# EAGLE board Carloop-v3.0 (EAGLE 7.5.0)
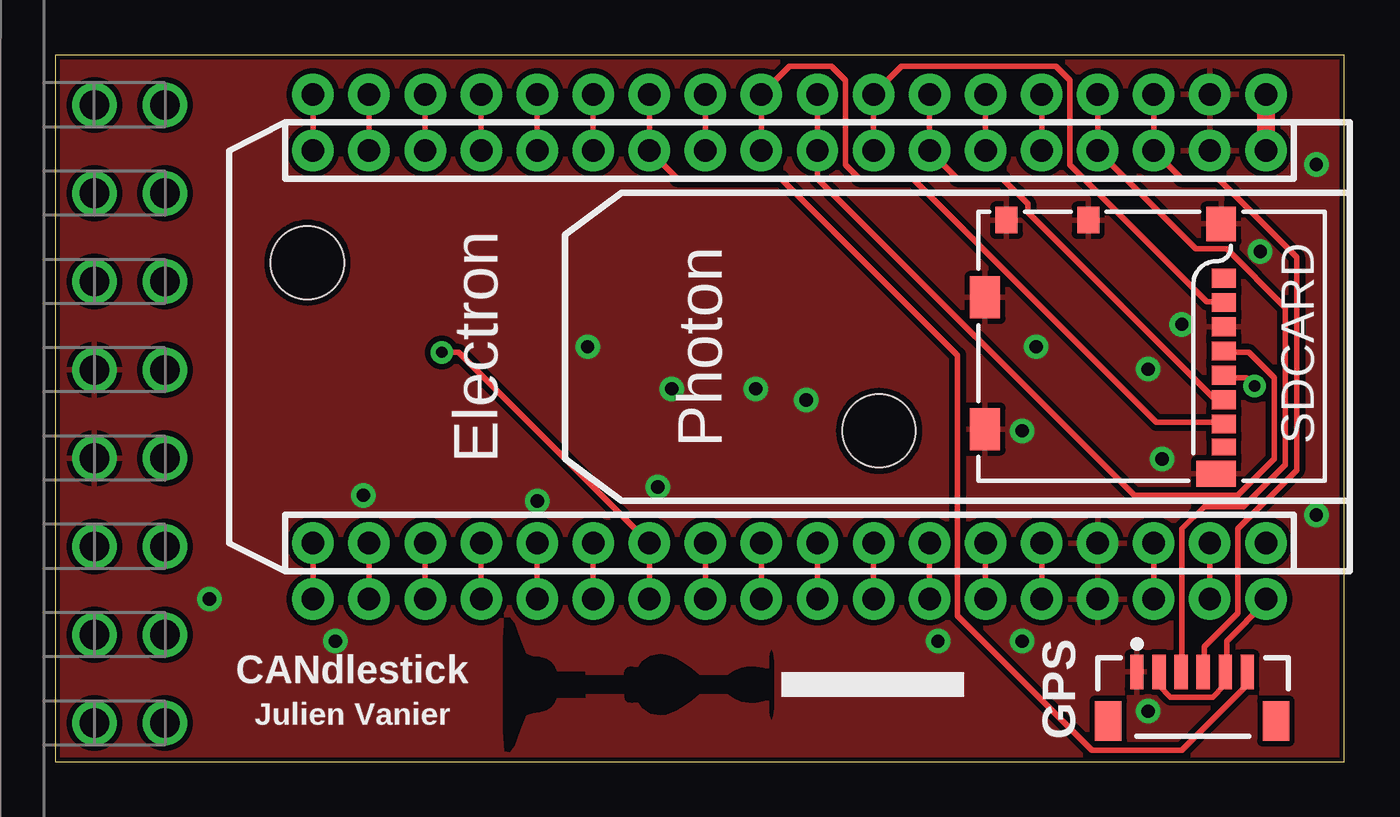
[diagram p0: board, top side]
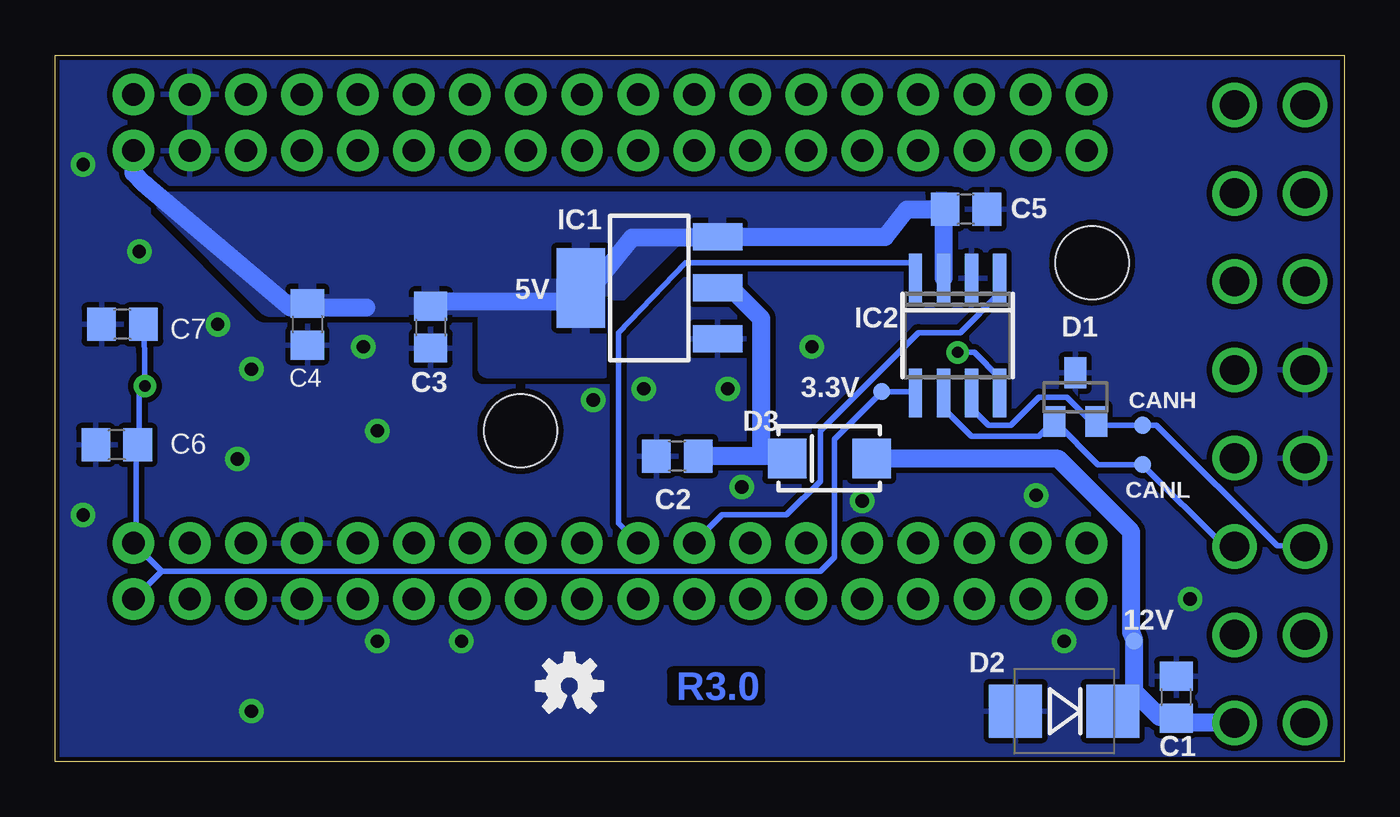
[diagram p1: board, bottom side, seen from below]

Size 58.42 x 32 mm. Coordinates in mm from the lower left corner, seen from the top.
Outline: 0,0 58.42,0 58.42,32 0,32 0,0
Copper layers (1*16): Top 0.035mm / dielectric 1.5mm / Bottom 0.035mm
Design rules "SparkFun *": minimum track width 8mil, minimum drill 20mil, track to track 10mil, track to pad 8mil, pad to pad 10mil, via to via 10mil, smd to smd 10mil, copper to edge 8mil, drill to drill 8mil, minimum pad ring 12mil, minimum via ring 10mil, stop-mask expansion 4mil, vias tented up to drill 45mil, thermal gap 10mil
Net classes: 0 default: width 0.254 mm; 1 power: width 0.813 mm, clearance 0.406 mm
tRestrict: area 20.3,0.4 to 32.6,6.5

## Footprints (pad centres in the part's own frame; a part is rotated, then mirrored left to right if it is on the bottom)
C0805 = smd 1.3 x 1.5: 1 -0.95,0; 2 0.95,0
SOT23 = smd 1 x 1.4: 1 -0.95,-1.1; 2 0.95,-1.1; 3 0,1.1
SMB-DIODE = smd 2.4 x 2.4: A 2.2,0; C -2.2,0
SMA-DIODE = smd 1.75 x 1.8: A -1.91,0; C 1.91,0
ELECTRON_EXTERNAL = drill 1.016 pad 1.88: 1 1.27,46.99; 2 1.27,44.45; 3 1.27,41.91; 4 1.27,39.37; 5 1.27,36.83; 6 1.27,34.29; 7 1.27,31.75; 8 1.27,29.21; 9 1.27,26.67; 10 1.27,24.13; 11 1.27,21.59; 12 1.27,19.05; 13 1.27,16.51; 14 1.27,13.97; 15 1.27,11.43; 16 1.27,8.89; 17 1.27,6.35; 18 1.27,3.81; 19 19.05,3.81; 20 19.05,6.35; 21 19.05,8.89; 22 19.05,11.43; 23 19.05,13.97; 24 19.05,16.51; 25 19.05,19.05; 26 19.05,21.59; 27 19.05,24.13; 28 19.05,26.67; 29 19.05,29.21; 30 19.05,31.75; 31 19.05,34.29; 32 19.05,36.83; 33 19.05,39.37; 34 19.05,41.91; 35 19.05,44.45; 36 19.05,46.99; @1 -1.27,46.99; @2 -1.27,44.45; @3 -1.27,41.91; @4 -1.27,39.37; @5 -1.27,36.83; @6 -1.27,34.29; @7 -1.27,31.75; @8 -1.27,29.21; @9 -1.27,26.67; @10 -1.27,24.13; @11 -1.27,21.59; @12 -1.27,19.05; @13 -1.27,16.51; @14 -1.27,13.97; @15 -1.27,11.43; @16 -1.27,8.89; @17 -1.27,6.35; @18 -1.27,3.81; @19 21.59,3.81; @20 21.59,6.35; @21 21.59,8.89; @22 21.59,11.43; @23 21.59,13.97; @24 21.59,16.51; @25 21.59,19.05; @26 21.59,21.59; @27 21.59,24.13; @28 21.59,26.67; @29 21.59,29.21; @30 21.59,31.75; @31 21.59,34.29; @32 21.59,36.83; @33 21.59,39.37; @34 21.59,41.91; @35 21.59,44.45; @36 21.59,46.99
JST-6-SMD-VERT-1.0MM = smd 0.6 x 1.55: 1 -2.54,1.27; 2 -1.54,1.27; 3 -0.54,1.27; 4 0.46,1.27; 5 1.46,1.27; 6 2.46,1.27 | smd 1.2 x 1.8: P$1 -3.84,-0.955; P$2 3.76,-0.955
SOT223 = smd 1.219 x 2.235: 1 -2.311,-3.099; 2 0,-3.099; 3 2.311,-3.099 | smd 3.6 x 2.2: 4 0,3.099
SO8 = smd 0.6 x 2.2: 1 -1.905,-2.6; 2 -0.635,-2.6; 3 0.635,-2.6; 4 1.905,-2.6; 5 1.905,2.6; 6 0.635,2.6; 7 -0.635,2.6; 8 -1.905,2.6
OBDII-COMTECH = drill 1.346: 1 -14,0; 2 -10,0; 3 -6,0; 4 -2,0; 5 2,0; 6 6,0; 7 10,0; 8 14,0; 9 -14,3.2; 10 -10,3.2; 11 -6,3.2; 12 -2,3.2; 13 2,3.2; 14 6,3.2; 15 10,3.2; 16 14,3.2
MICRO-SD-MOLEX = smd 0.75 x 1.1: 1 -4.545,0.25 | smd 0.85 x 1.1: 2 -3.495,0.25; 3 -2.395,0.25; 4 -1.295,0.25; 5 -0.195,0.25; 6 0.905,0.25; 7 2.005,0.25; 8 3.105,0.25 | smd 1.2 x 1: CD1 5.74,6.4; CD2 5.74,10.1 | smd 1.55 x 1.35: G1 5.565,0.375 | smd 1.17 x 1.8: G2 -5.755,0.6 | smd 1.9 x 1.35: G3 -3.735,11.075; G4 2.235,11.075
STAND-OFF = hole 3.302: 0,0
PAD.03X.03 = smd 0.762 x 0.762: P$1 0,0

## Placement (x,y rotation side)
C1  .47u  [C0805]  7.62,2.92 90 bottom
C2  10u  [C0805]  30.23,13.84 180 bottom
C3  22u  [C0805]  41.4,19.68 270 bottom
C4  DNP  [C0805]  46.99,19.81 270 bottom
C5  0.1u  [C0805]  17.14,25.02 180 bottom
C6  0.1u  [C0805]  55.63,14.35 180 bottom
C7  1u  [C0805]  55.37,19.81 180 bottom
D1  PESD1CAN  [SOT23]  12.19,16.51 0 bottom
D2  1SMB16CAT3G  [SMB-DIODE]  12.7,2.29 180 bottom
D3  RS1J  [SMA-DIODE]  23.34,13.74 180 bottom
ELECTRON  ELECTRON_WITH_EXTERNAL_HEADERS  [ELECTRON_EXTERNAL]  7.87,28.96 270 top
F2  [OSHW-LOGO-S]  35.12,3.43 0 bottom
GPS  JST  [JST-6-SMD-VERT-1.0MM]  51.56,2.79 0 top
IC1  NCP1117  [SOT223]  31.5,21.46 90 bottom
IC2  TJA1049  [SO8]  17.53,19.3 180 bottom
J1  OBDII  [OBDII-COMTECH]  1.78,15.75 270 top
SDCARD  USD-SOCKETMOLEX  [MICRO-SD-MOLEX]  53.21,18.8 90 top
STANDOFF1  STAND-OFF  [STAND-OFF]  11.43,22.61 0 top
STANDOFF2  STAND-OFF  [STAND-OFF]  37.34,14.99 0 top
TP1  CANH  [PAD.03X.03]  9.14,15.24 0 bottom
TP2  CANL  [PAD.03X.03]  9.14,13.46 0 bottom
TP3  12V  [PAD.03X.03]  9.53,5.46 0 bottom
TP5  3.3V  [PAD.03X.03]  20.95,16.76 0 bottom
ZDRAW1  [A4L-LOC]  -55.68,-52.84 0 top  (outside the outline)

## Library data of the parts
C1 = rcl; PARTNO: C0805C474K5RACTU
C2 = rcl; PARTNO: GRM21BR6YA106KE43L
C3 C4 = rcl; PARTNO: GRM219R61A226MEA0D
C5 C6 = rcl; PARTNO: 08055C104KAT2A
C7 = rcl; PARTNO: CC0805KKX7R7BB105
D1 = MuniRent; PARTNO: PESD1CAN-215
D2 = BUG; PARTNO: 1SMB16CAT3G; ROLE: Overvoltage protection
D3 = BUG; PARTNO: RS1J-E3/5AT; ROLE: Reverse protection
ELECTRON = MuniRent; PARTNO: PPTC181LFBN-RC
F2 = SparkFun-Aesthetics
GPS = MuniRent; PARTNO: BM06B-SRSS-TB; PROD_ID: CONN-08249
IC1 = MuniRent; PARTNO: NCP1117LPST50T3G
IC2 = MuniRent; PARTNO: TJA1049T-118
J1 = MuniRent; PARTNO: OBD-II
SDCARD = MuniRent; PARTNO: 1040310811
STANDOFF1 STANDOFF2 = SparkFun-Electromechanical
TP1-TP3 TP5 = SparkFun-Passives
ZDRAW1 = frames

## Nets
3.3V: C6.1 C7.1 ELECTRON.36 ELECTRON.@36 GPS.2 GPS.5 IC2.5 SDCARD.4 TP5.P$1
5V [power]: C3.1 C4.1 C5.2 ELECTRON.1 ELECTRON.@1 IC1.3 IC1.4 IC2.3
+12V [power]: C1.1 D2.C D3.A J1.16 TP3.P$1
CANA_EN: ELECTRON.25 ELECTRON.@25 IC2.8
CANA_RX: ELECTRON.27 ELECTRON.@27 IC2.4
CANA_TX: ELECTRON.26 ELECTRON.@26 IC2.1
GND: C1.2 C2.2 C3.2 C4.2 C5.1 C6.2 C7.2 D1.3 D2.A ELECTRON.2 ELECTRON.33 ELECTRON.@2 ELECTRON.@33 GPS.1 IC1.1 IC2.2 J1.4 J1.5 SDCARD.6 SDCARD.CD1 SDCARD.CD2 SDCARD.G1 SDCARD.G2 SDCARD.G3 SDCARD.G4
GPS_EN: ELECTRON.12 ELECTRON.@12 GPS.6
GPS_RX: ELECTRON.3 ELECTRON.@3 GPS.4
GPS_TX: ELECTRON.4 ELECTRON.@4 GPS.3
HSPD_HI: D1.2 IC2.7 J1.6 TP1.P$1
HSPD_LO: D1.1 IC2.6 J1.14 TP2.P$1
N$1: ELECTRON.13 ELECTRON.@13
N$7: ELECTRON.14 ELECTRON.@14
N$10: ELECTRON.35 ELECTRON.@35
N$11: ELECTRON.34 ELECTRON.@34
N$12: ELECTRON.32 ELECTRON.@32
N$13: ELECTRON.31 ELECTRON.@31
N$14: ELECTRON.30 ELECTRON.@30
N$15: ELECTRON.29 ELECTRON.@29
N$16: ELECTRON.28 ELECTRON.@28
N$17: ELECTRON.15 ELECTRON.@15
N$18: ELECTRON.11 ELECTRON.@11
N$19: ELECTRON.16 ELECTRON.@16
N$20: ELECTRON.17 ELECTRON.@17
N$21: ELECTRON.18 ELECTRON.@18
N$22: ELECTRON.19 ELECTRON.@19
N$23: ELECTRON.20 ELECTRON.@20
N$24: ELECTRON.21 ELECTRON.@21
N$25: ELECTRON.6 ELECTRON.@6
N$26: ELECTRON.5 ELECTRON.@5
N$27: ELECTRON.23 ELECTRON.@23
N$28: ELECTRON.24 ELECTRON.@24
N$29: ELECTRON.22 ELECTRON.@22
N$31 [power]: C2.1 D3.C IC1.2
SD_CS: ELECTRON.10 ELECTRON.@10 SDCARD.2
SPI_MISO: ELECTRON.8 ELECTRON.@8 SDCARD.7
SPI_MOSI: ELECTRON.7 ELECTRON.@7 SDCARD.3
SPI_SCK: ELECTRON.9 ELECTRON.@9 SDCARD.5

## Tracks (layer width: path | path; a pad name or v marks a point on that pad's centre or on a via)
3.3V  (via drill 0.51)
  Top 0.254: GPS.2 50.04,4.06 50.04,3.43 50.55,2.92 52.45,2.92 52.96,3.43 52.96,4.06 GPS.5 53.09,4.06 53.09,5.46 54.86,7.24 ELECTRON.@36 | v54.36,17.02 53.98,17.4 53.09,17.4 SDCARD.4
  Bottom 0.254: C7.1 54.36,18.54 v54.36,17.02 54.61,16.76 54.61,13.72 C6.1 54.74,13.72 54.74,9.91 ELECTRON.36 53.59,8.64 | IC2.5 19.43,16.76 TP5.P$1 23.11,14.61 23.11,9.27 23.75,8.64 53.59,8.64 | 53.59,8.64 ELECTRON.@36
5V
  Top 0.813: ELECTRON.@1 ELECTRON.1
  Bottom 0.813: 41.53,20.45 41.4,20.57 C3.1 41.02,20.83 34.8,20.83 34.67,20.95 IC1.4 34.29,21.21 32.26,23.75 28.45,23.75 IC1.3 20.8,23.77 19.81,25.02 C5.2 18.16,24.95 IC2.3 | ELECTRON.1 54.86,26.67 54.36,26.16 47.75,20.57 46.99,20.57 | 44.32,20.57 46.99,20.57 | C4.1 46.99,20.57
  pour Bottom (isolate 0.406): 18.03,25.4 53.59,25.4 48.77,20.57 39.12,20.57 38.86,20.32 38.86,17.78 33.53,17.78 33.53,20.57 29.97,24.13 20.83,24.13 20.32,24.64 20.32,24.89 20.07,25.15 18.29,25.15
+12V
  Bottom 0.813: 9.53,3.17 TP3.P$1 9.65,5.84 9.65,10.41 12.95,13.72 21.34,13.72 D3.A | 9.53,3.17 10.41,2.29 D2.C | 9.53,3.17 8.38,2.03 7.62,2.03 C1.1 7.24,1.78 5.08,1.78 J1.16
CANA_EN  (via drill 0.51)
  Top 0.254: v17.53,18.54 18.29,18.54 ELECTRON.25 ELECTRON.@25
  Bottom 0.254: IC2.8 15.62,17.4 16.76,18.54 v17.53,18.54
CANA_RX
  Top 0.254: ELECTRON.27 ELECTRON.@27
  Bottom 0.254: ELECTRON.27 32.89,10.79 32.89,19.43 29.84,22.61 19.43,22.61 IC2.4
CANA_TX
  Top 0.254: ELECTRON.26 ELECTRON.@26
  Bottom 0.254: IC2.1 15.62,21.21 17.4,19.43 19.3,19.43 23.75,14.99 23.75,12.7 25.27,11.18 28.19,11.18 ELECTRON.26
GND  (via drill 0.6)
  other vias: 12.7,5.46 6.99,7.37 13.97,12.06 21.84,11.81 27.3,12.45 24.13,18.8 27.94,16.89 31.75,16.89 34.04,16.38 44.45,18.8 43.81,14.99 50.16,13.72 54.61,23.11 57.15,11.18 57.15,27.05 49.53,2.29 43.81,5.46 40.01,5.46 49.53,17.78 51.05,19.81
  pour Top (rank 4): 0,0 58.42,0 58.42,32 0,32
  pour Bottom (rank 5): 0,0 58.42,0 58.42,32 0,32
GPS_EN
  Top 0.254: GPS.6 53.98,4.06 53.98,3.43 51.05,0.51 46.99,0.51 40.89,6.6 40.89,18.41 32.89,26.42 28.19,26.42 ELECTRON.12 ELECTRON.@12
GPS_RX
  Top 0.254: GPS.4 52.07,4.06 52.07,5.21 53.59,6.73 53.59,10.54 56.26,13.21 56.26,22.86 52.7,26.42 51.05,26.42 ELECTRON.3 ELECTRON.@3
GPS_TX
  Top 0.254: GPS.3 51.05,4.06 51.05,10.54 52.07,11.56 53.85,11.56 55.75,13.46 55.75,20.57 53.09,23.24 51.69,23.24 ELECTRON.4 ELECTRON.@4
HSPD_HI
  Bottom 0.254: IC2.7 16.89,16 16.13,15.24 15.11,15.24 13.84,16.51 12.57,16.51 11.56,15.49 11.3,15.49 D1.2 11.18,15.37 11.05,15.24 TP1.P$1 8.51,15.24 3.05,9.78 1.78,9.78 J1.6
HSPD_LO
  Bottom 0.254: IC2.6 18.16,16 16.89,14.73 13.84,14.73 13.21,15.37 D1.1 13.08,15.37 11.18,13.46 TP2.P$1 5.46,9.78 5.08,9.78 J1.14
N$1
  Top 0.254: ELECTRON.@13 ELECTRON.13
N$7
  Top 0.254: ELECTRON.@14 ELECTRON.14
N$10
  Top 0.254: ELECTRON.35 ELECTRON.@35
N$11
  Top 0.254: ELECTRON.34 ELECTRON.@34
N$12
  Top 0.254: ELECTRON.32 ELECTRON.@32
N$13
  Top 0.254: ELECTRON.31 ELECTRON.@31
N$14
  Top 0.254: ELECTRON.30 ELECTRON.@30
N$15
  Top 0.254: ELECTRON.29 ELECTRON.@29
N$16
  Top 0.254: ELECTRON.28 ELECTRON.@28
N$17
  Top 0.254: ELECTRON.@15 ELECTRON.15
N$18
  Top 0.254: ELECTRON.@11 ELECTRON.11
N$19
  Top 0.254: ELECTRON.@16 ELECTRON.16
N$20
  Top 0.254: ELECTRON.@17 ELECTRON.17
N$21
  Top 0.254: ELECTRON.@18 ELECTRON.18
N$22
  Top 0.254: ELECTRON.19 ELECTRON.@19
N$23
  Top 0.254: ELECTRON.20 ELECTRON.@20
N$24
  Top 0.254: ELECTRON.21 ELECTRON.@21
N$25
  Top 0.254: ELECTRON.@6 ELECTRON.6
N$26
  Top 0.254: ELECTRON.@5 ELECTRON.5
N$27
  Top 0.254: ELECTRON.23 ELECTRON.@23
N$28
  Top 0.254: ELECTRON.24 ELECTRON.@24
N$29
  Top 0.254: ELECTRON.22 ELECTRON.@22
N$31
  Bottom 0.813: 26.42,13.84 25.27,13.84 D3.C | 26.42,13.84 C2.1 | IC1.2 27.81,21.46 26.42,20.07 26.42,13.84
SD_CS
  Top 0.254: SDCARD.2 52.96,15.37 49.91,15.37 38.86,26.42 36.45,26.42 35.81,27.05 35.81,30.86 35.18,31.5 33.27,31.5 ELECTRON.@10 ELECTRON.10
SPI_MISO
  Top 0.254: SDCARD.7 52.96,20.83 52.2,20.83 45.97,27.05 45.97,30.86 45.34,31.5 38.35,31.5 ELECTRON.@8 ELECTRON.8
SPI_MOSI
  Top 0.254: SDCARD.3 52.96,16.51 52.45,16.51 44.07,24.89 44.07,25.27 42.93,26.42 40.89,26.42 ELECTRON.7 ELECTRON.@7
SPI_SCK
  Top 0.254: SDCARD.5 53.09,18.54 54.1,18.54 55.24,17.4 55.24,13.72 53.59,12.06 48.9,12.06 34.54,26.42 ELECTRON.9 ELECTRON.@9

## Text on the board
Bottom: R3.0
tPlace: CANdlestick | Julien Vanier
bPlace: 5V | 3.3V | CANH | CANL | 12V
Document: NOTES: | Revision 3.0 | Julien Vanier | jvanier@gmail.com